# Altium PCB MEGA2560_Rev3e.PcbDoc (part 1 of 2)
Units mil, origin at the board's own origin, x right, y up, seen from the top; angles counter-clockwise.
Board outline 4000 x 2100 mil, 2 copper layers (Top, Bottom); 60 components, 84 nets, 364 pads, 139 vias.
Unrouted connection lines stored in the file: 1.
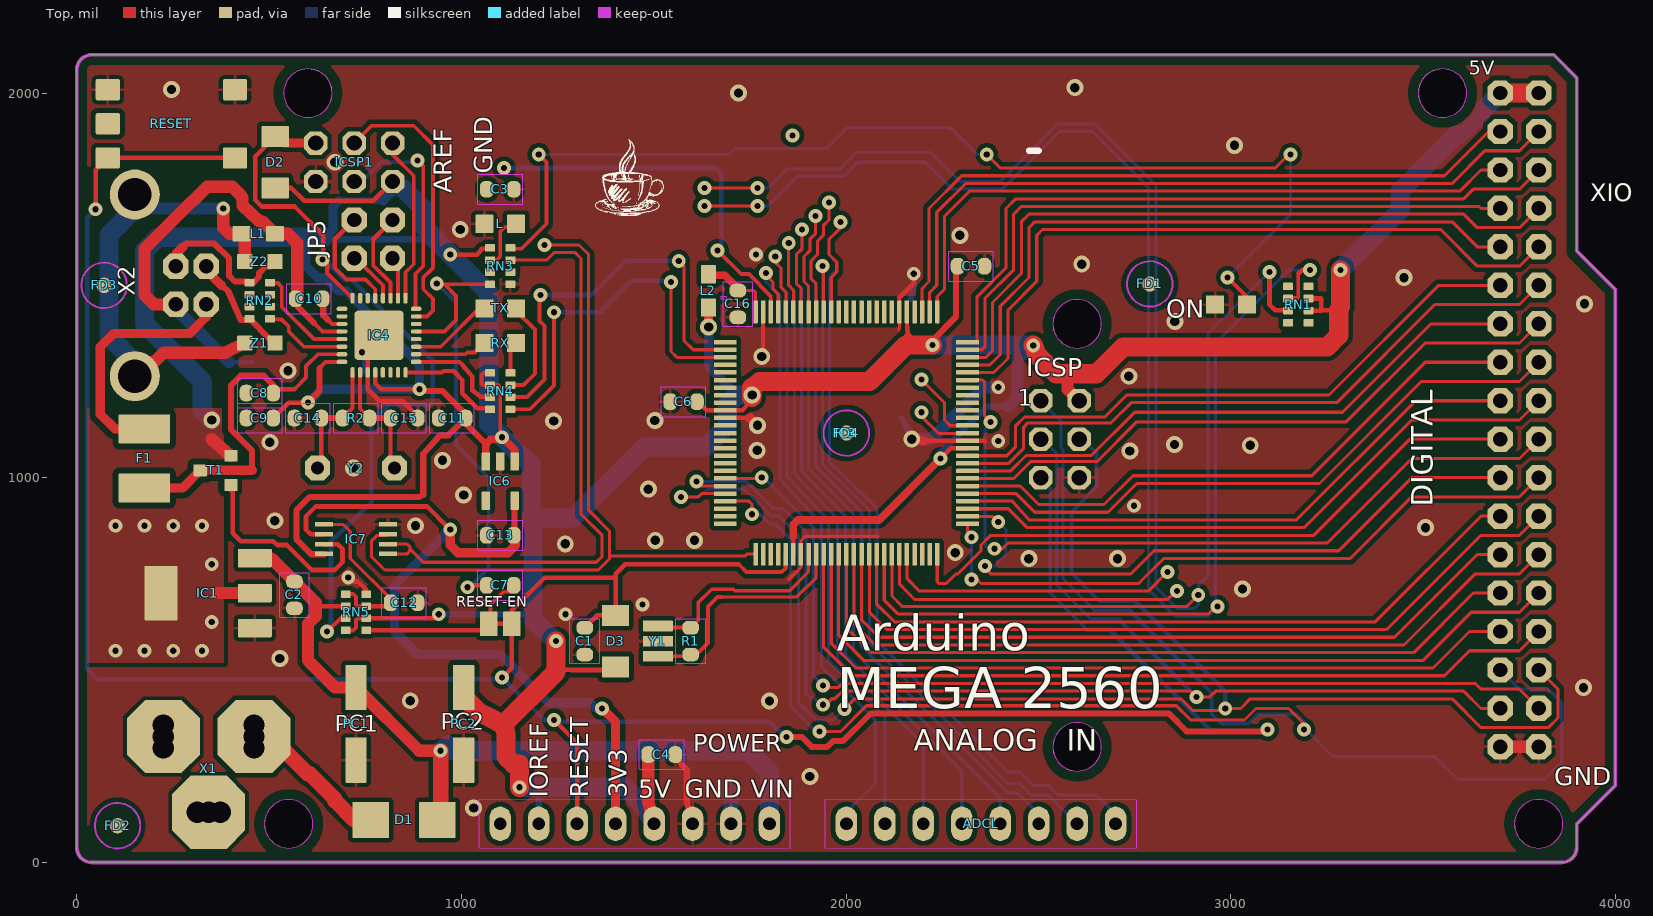
[diagram p0: Top view]
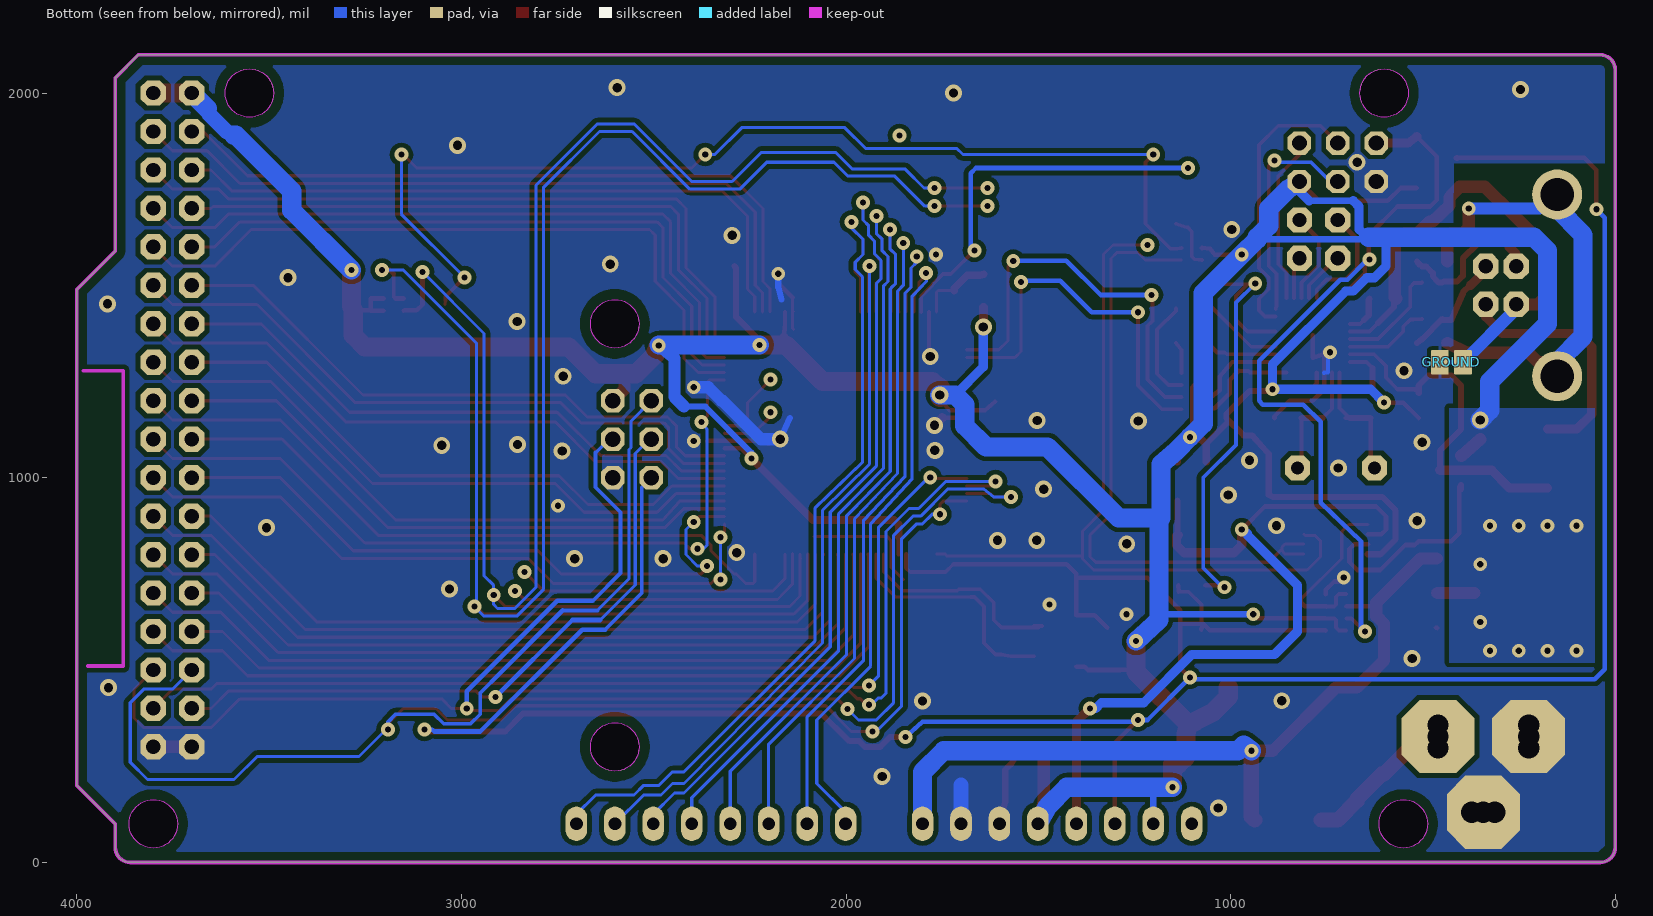
[diagram p1: Bottom view, seen from below]

## Layer stack, top to bottom
Top Solder: solder mask 0.4, Solder Resist, Dk 3.5
Top: signal copper 1.378
Dielectric 1: dielectric 12.6, FR-4, Dk 4.8
Bottom: signal copper 1.378
Bottom Solder: solder mask 0.4, Solder Resist, Dk 3.5

## Board outline
3840,2100 3900,2040 3900,1590 4000,1490 4000,200 3900,100 3900,39.37 cw(c3860.63,39.37) 3860.63,0 39.37,0 cw(c39.37,39.37) 0,39.37 0,2060.63 cw(c39.37,2060.63) 39.37,2100
cut-out: 551.01,37.51 ccw(c551.01,100.5) 614,100.5 ccw(c551.01,100.5) 551.01,163.49 ccw(c551.01,100.5) 488.02,100.5 ccw(c551.01,100.5)
cut-out: 2601.01,1337.51 ccw(c2601.01,1400.5) 2664,1400.5 ccw(c2601.01,1400.5) 2601.01,1463.49 ccw(c2601.01,1400.5) 2538.02,1400.5 ccw(c2601.01,1400.5)
cut-out: 2601.01,237.51 ccw(c2601.01,300.5) 2664,300.5 ccw(c2601.01,300.5) 2601.01,363.49 ccw(c2601.01,300.5) 2538.02,300.5 ccw(c2601.01,300.5)
cut-out: 3801.01,37.51 ccw(c3801.01,100.5) 3864,100.5 ccw(c3801.01,100.5) 3801.01,163.49 ccw(c3801.01,100.5) 3738.02,100.5 ccw(c3801.01,100.5)
cut-out: 601.01,1937.51 ccw(c601.01,2000.5) 664,2000.5 ccw(c601.01,2000.5) 601.01,2063.49 ccw(c601.01,2000.5) 538.02,2000.5 ccw(c601.01,2000.5)
cut-out: 3551.01,1937.51 ccw(c3551.01,2000.5) 3614,2000.5 ccw(c3551.01,2000.5) 3551.01,2063.49 ccw(c3551.01,2000.5) 3488.02,2000.5 ccw(c3551.01,2000.5)

## Design rules (kind name [scope] priority, off if disabled: settings)
BoardOutlineClearance mdCopperDimension [All] p1: gap=10 ignorepadtopadclearanceinfootprint=FALSE except(0: Arc-SplitContinuation Track-SplitContinuation SMDPad-SplitContinuation THPad-SplitContinuation Via-SplitContinuation Fill-SplitContinuation Poly-SplitContinuation Region-SplitContinuation Text-SplitContinuation; 27: Poly-OutlineEdge Poly-CavityEdge Poly-CutoutEdge Poly-SplitBarrior)
Clearance Clearance_for_PolygonClass_Isolate_16 [InPolygonClass('Isolate_16') vs IsArc Or IsTrack Or IsPad Or IsVia Or IsFill Or IsRegion Or IsText] p1: gap=16 ignorepadtopadclearanceinfootprint=FALSE
Clearance Clearance_for_PolygonClass_Isolate_12 [InPolygonClass('Isolate_12') vs IsArc Or IsTrack Or IsPad Or IsVia Or IsFill Or IsRegion Or IsText] p2: gap=12 ignorepadtopadclearanceinfootprint=FALSE
Clearance "Clearance (Same Net)" [All] p3: gap=7 ignorepadtopadclearanceinfootprint=FALSE
Clearance "Clearance_for_NetClass_power usb" [InNetClass('power usb') vs InNetClass('power usb')] p4: gap=8 ignorepadtopadclearanceinfootprint=FALSE
Clearance Clearance_for_NetClass_gnd [InNetClass('gnd') vs InNetClass('gnd')] p5: gap=8 ignorepadtopadclearanceinfootprint=FALSE
Clearance Clearance_for_NetClass_power [InNetClass('power') vs InNetClass('power')] p6: gap=8 ignorepadtopadclearanceinfootprint=FALSE
Clearance [All] p7: gap=7 ignorepadtopadclearanceinfootprint=FALSE except(8: Track-Via THPad-THPad; 10: Via-Via; 12: THPad-Via)
HoleSize "HoleSize_For_NetClass_power usb" [InNetClass('power usb')] p1: absolutevalues=TRUE maxlimit=16 minlimit=16 maxpercent=80.000 minpercent=20.000
HoleSize HoleSize_For_NetClass_gnd [InNetClass('gnd')] p2: absolutevalues=TRUE maxlimit=16 minlimit=16 maxpercent=80.000 minpercent=20.000
HoleSize HoleSize_For_NetClass_power [InNetClass('power')] p3: absolutevalues=TRUE maxlimit=16 minlimit=16 maxpercent=80.000 minpercent=20.000
HoleSize [All] p4: absolutevalues=TRUE maxlimit=100000 minlimit=16 maxpercent=80.000 minpercent=20.000
HoleToHoleClearance mdDrill [All] p1: gap=12 allowstackedmicrovias=TRUE
MinimumSolderMaskSliver [All] p1 off: minsoldermaskwidth=10
PasteMaskExpansion Expansion_SMDPaste_OFF [InPadClass('SMDPaste_OFF')] p1: expansion=0
PasteMaskExpansion mlMinCreamFrame [All] p2: expansion=-2
PolygonConnect PolygonConnect_For_PolygonThermal_ON_Width80000_Gap100000 [InPolygonClass('PolygonThermal_ON_Width80000_Gap100000') vs Not IsVia] p1: connectstyle=Relief reliefconductorwidth=8 reliefentries=4 polygonreliefangle="90 Angle" airgapwidth=10
PolygonConnect PolygonConnect_For_PolygonThermal_ON_Width120000_Gap100000 [InPolygonClass('PolygonThermal_ON_Width120000_Gap100000') vs Not IsVia] p2: connectstyle=Relief reliefconductorwidth=12 reliefentries=4 polygonreliefangle="90 Angle" airgapwidth=10
PolygonConnect PolygonConnect_For_PolygonThermal_OFF [InPolygonClass('PolygonThermal_OFF')] p3: connectstyle=Direct reliefconductorwidth=10 reliefentries=4 polygonreliefangle="90 Angle" airgapwidth=10
PolygonConnect ThermalVias [IsVia] p4: connectstyle=Direct reliefconductorwidth=10 reliefentries=4 polygonreliefangle="90 Angle" airgapwidth=10
PolygonConnect [All] p5: connectstyle=Relief reliefconductorwidth=10 reliefentries=4 polygonreliefangle="90 Angle" airgapwidth=10
RoutingVias [All] p1: holewidth=16 width=36 viastyle="Through Hole" minholewidth=16 minwidth=36 maxholewidth=100 maxwidth=100
SolderMaskExpansion Expansion_SMDSolder_OFF [InPadClass('SMDSolder_OFF')] p1: expansion=0 istentingtop=FALSE
SolderMaskExpansion mlMinStopFrame [All] p2: expansion=2 istentingtop=FALSE
Width "Width_For_NetClass_power usb" [InNetClass('power usb')] p1: maxlimit=40 minlimit=10 preferedwidth=20
Width Width_For_NetClass_gnd [InNetClass('gnd')] p2: maxlimit=24 minlimit=10 preferedwidth=12
Width Width_For_NetClass_power [InNetClass('power')] p3: maxlimit=48 minlimit=10 preferedwidth=24
Width [All] p4: maxlimit=50 minlimit=5 preferedwidth=8 minimp=50.000000 maximp=50.000000 favimp=50.000000
26 further rules are at their usual default settings.

## Classes and differential pairs
component class MEGA2560_Rev3e_1: C7 C8 C9 C10 C14 C15 D2 F1 GROUND IC4 ICSP1 JP5 L1 R2 RESET-EN RN2 RN4 RX TX X2 Y2 Z1 Z2
component class MEGA2560_Rev3e_0: ADCL C1 C2 C3 C4 C5 C6 C11 C12 C13 C16 D1 D3 FD1 FD2 FD3 FD4 IC1 IC6 IC7 ICSP L L2 ON PC1 PC2 POWER R1 RESET RN1 RN3 RN5 T1 X1 XIO Y1
polygon class PolygonThermal_ON_Width80000_Gap100000: Polygon_1_Net_GND Polygon_2_Net_GND
polygon class PolygonThermal_ON_Width120000_Gap100000: Polygon_2_Net_+5V
polygon class PolygonThermal_OFF: Polygon_1_Net_+5V
polygon class Isolate_16: Polygon_1_Net_+5V
polygon class Isolate_12: Polygon_1_Net_GND Polygon_2_Net_GND
pad class SMDSolder_OFF: IC4-33
pad class SMDPaste_OFF: IC4-33 RESET-5

## Components (designator, comment, footprint, x,y, rotation, side; value= is the part's Value field where it differs from the comment)
ADCL "FH254-108DF08500V" 1X08 2351.01,100.5 r0 top
C1 "22p" C0603-ROUND 1321.01,575.5 r270 top
C2 "100nF" C0603-ROUND 566.01,695.5 r270 top
C3 "100nF" C0603-ROUND 1101.01,1750.5 r0 top
C4 "100nF" C0603-ROUND 1521.01,280.5 r0 top
C5 "100nF" C0603-ROUND 2325.01,1550.5 r0 top
C6 "100nF" C0603-ROUND 1577.58,1198.1 r180 top
C7 "100nF" C0603-ROUND 1101.01,720.5 r0 top
C8 "100nF" C0603-ROUND 476.01,1220.5 r180 top
C9 "100nF" C0603-ROUND 476.01,1155.5 r180 top
C10 "1uF" C0603-ROUND 604.01,1465.5 r180 top
C11 "100nF" C0603-ROUND 976.01,1155.5 r0 top
C12 "100nF" C0603-ROUND 851.01,675.5 r180 top
C13 "1uF" C0603-ROUND 1101.01,850.5 r0 top
C14 "22p" C0603-ROUND 601.01,1155.5 r180 top
C15 "22p" C0603-ROUND 851.01,1155.5 r0 top
C16 "100nF" C0603-ROUND 1718.93,1452.08 r270 top
D1 "M7" SMB 851.01,110.5 r180 top
D2 "CD1206-S01575" MINIMELF 516.01,1820.5 r90 top
D3 "CD1206-S01575" MINIMELF 1401.01,575.5 r90 top
F1 "MF-MSMF050-2 500mA" L1812 176.01,1050.5 r90 top
FD1 "FIDUCIALMOUNT" FIDUCIA-MOUNT 2790.01,1504.13 r0 top
FD2 "FIDUCIALMOUNT" FIDUCIA-MOUNT 106.01,95.5 r0 top
FD3 "FIDUCIALMOUNT" FIDUCIA-MOUNT 71.01,1500.5 r0 top
FD4 "FIDUCIALMOUNT" FIDUCIA-MOUNT 2001.01,1116.5 r0 top
GROUND "SJ" SJ 426.01,1300.5 r0 bottom
IC1 "1870_LD1117S50CTR" LINEAR_SOT223 341.01,700.5 r90 top
IC3 "ATMEGA2560-15AU" TQFP100 2001.01,1116.5 r0 top
IC4 "ATMEGA16U2-MU" MLF32 786.01,1370.5 r90 top
IC6 "LP2985-33DBVR" SOT23-DBV 1101.01,991.5 r180 top
IC7 "LMV358IDGKR" MSOP08 726.01,840.5 r90 top
ICSP "ICSP" 2X03 2556.01,1100.5 r270 top
ICSP1 "ICSP" 2X03 721.01,1820.5 r180 top
JP5 "2x2M - NM" 2X02 771.01,1620.5 r90 top
L "Yellow" CHIPLED_0805 1101.01,1660.5 r90 top
L1 "MH2029-300Y" 0805 472.01,1634.5 r180 top
L2 "10uH" 0805 1642.21,1485.92 r270 top
ON "Green" CHIPLED_0805 3001.01,1450.5 r90 top
PC1 "47uF" PANASONIC_D 726.01,360.5 r90 top
PC2 "47uF" PANASONIC_D 1006.01,360.5 r90 top
POWER "FH254-108DF08500V" 1X08 1451.01,100.5 r0 top
R1 "1M" R0603-ROUND 1596.01,575.5 r90 top
R2 "1M" R0603-ROUND 726.01,1155.5 r0 top
RESET "TS42" TS42 246.01,1920.54 r0 top
RESET-EN "SJ" SJ 1101.01,620.5 r0 top
RN1 "10k" CAY16 3176.01,1450.5 r270 top
RN2 "22R" CAY16 476.01,1460.5 r90 top
RN3 "1K" CAY16 1101.01,1550.5 r270 top
RN4 "1K" CAY16 1101.01,1225.5 r90 top
RN5 "10k" CAY16 726.01,650.5 r90 top
RX "Yellow" CHIPLED_0805 1101.01,1350.5 r90 top
T1 "PMV48XP" SOT-23 361.01,1020.5 r270 top
TX "Yellow" CHIPLED_0805 1101.01,1440.5 r90 top
X1 "POWERSUPPLY_DC21MMX" POWERSUPPLY_DC-21MM 211.01,330.5 r90 top
X2 "0056_USB-B-S-RA-WT-SPCC" PN61729 151.01,1500.5 r270 top
XIO "18x2F-H8.5" 2X18 3751.01,1150.5 r270 top
Y1 "CSTCE16M0V53-R0" RESONATOR 1511.01,575.5 r270 top
Y2 "16MHz" QS 726.01,1025.5 r180 top
Z1 "BRNCG0603MLC-05E" CT/CN0603 476.01,1350.5 r0 top
Z2 "BRNCG0603MLC-05E" CT/CN0603 476.01,1562.5 r0 top

## Footprints (in the part's own frame and the unit in brackets; to place one, negate y for a bottom-side part, rotate by r counter-clockwise, add the part's x,y. Pads: shape width x height; smd on the part's side, far side on the other; paste and mask are expansions set on the pad)
1X08 [mil] "1X08"
  oval 56x89.6 hole 33.46: 1(-350,0) 2(-250,0) 3(-150,0) 4(-50,0) 5(50,0) 6(150,0) 7(250,0) 8(350,0)
  Top keep-out lines w1.97: -404.33,-61.81 404.33,-62.99 404.33,62.99 -404.33,64.17 -404.33,-61.81
2X02 [mil] "2X02"
  oct 66x66 / inner round 60.98 / far side oct 66x66 hole 37.4: 1(-50,-50) 2(-50,50) 3(50,-50) 4(50,50)
2X03 [mil] "2X03"
  oct 61.02x61.02 / inner round 56.38 / far side oct 61.02x61.02 hole 40: 1(-100,-50) 2(-100,50) 3(0,-50) 4(0,50) 5(100,-50) 6(100,50)
2X18 [mil] "2X18"
  oct 66x66 / inner round 60.98 / far side oct 66x66 hole 37.4: 1(-850,-50) 2(-850,50) 3(-750,-50) 4(-750,50) 5(-650,-50) 6(-650,50) 7(-550,-50) 8(-550,50) 9(-450,-50) 10(-450,50) 11(-350,-50) 12(-350,50) 13(-250,-50) 14(-250,50) 15(-150,-50) 16(-150,50) 17(-50,-50) 18(-50,50) 19(50,-50) 20(50,50) 21(150,-50) 22(150,50) 23(250,-50) 24(250,50) 25(350,-50) 26(350,50) 27(450,-50) 28(450,50) 29(550,-50) 30(550,50) 31(650,-50) 32(650,50) 33(750,-50) 34(750,50) 35(850,-50) 36(850,50)
0805 [mm] "0805"
  rrect10% 1.2x1 smd: 1(-1.1,0) 2(1.1,0)
C0603-ROUND [mil] "C0603-ROUND"
  rrect80% 35.37x43.31 smd: 1(-35,0) 2(35,0)
  Top keep-out lines w2: 57.99,-38.7 -57.99,-38.7 -57.99,38.7 57.99,38.7 57.99,-38.7
CAY16 [mm] "CAY16"
  rrect20% 0.5x0.65 smd: 1(-1.2,-0.675) 2(-0.4,-0.675) 3(0.4,-0.675) 4(1.2,-0.675) 5(1.2,0.675) 6(0.4,0.675) 7(-0.4,0.675) 8(-1.2,0.675)
CHIPLED_0805 [mil] "CHIPLED_0805"
  rrect8% 47.24x47.24 smd: A(0,-41.34) C(0,41.34)
CT/CN0603 [mm] "CT/CN0603"
  rrect10% 1x1 smd: 1(-1,0) 2(1,0)
FIDUCIA-MOUNT [mil] "FIDUCIA-MOUNT"
  rrect100% 40x40 smd: P$1(0,0)
  Top keep-out circle w5: c0,0 r59.06
L1812 [mil] "L1812"
  rrect5% 74.8x133.86 smd: 1(-76.77,0) 2(76.77,0)
LINEAR_SOT223 [mil] "LINEAR_SOT223"
  rrect8% 48x88 smd: 1(-91,-122) 2(0,-122) 3(91,-122)
  rrect4% 141.73x86.61 smd: 4(0,122.01)
MINIMELF [mil] "MINIMELF"
  rrect7% 55.12x70.87 smd: A(66.93,0) C(-66.93,0)
MLF32 [mil] "MLF32"
  rrect80% 27.56x11.02 smd: 1(-96.46,68.9) 2(-96.46,49.21) 3(-96.46,29.53) 4(-96.46,9.84) 5(-96.46,-9.84) 6(-96.46,-29.53) 7(-96.46,-49.21) 8(-96.46,-68.9) 17(96.46,-68.9) 18(96.46,-49.21) 19(96.46,-29.53) 20(96.46,-9.84) 21(96.46,9.84) 22(96.46,29.53) 23(96.46,49.21) 24(96.46,68.9)
  rrect80% 11.02x27.56 smd: 9(-68.9,-96.46) 10(-49.21,-96.46) 11(-29.53,-96.46) 12(-9.84,-96.46) 13(9.84,-96.46) 14(29.53,-96.46) 15(49.21,-96.46) 16(68.9,-96.46) 25(68.9,96.46) 26(49.21,96.46) 27(29.53,96.46) 28(9.84,96.46) 29(-9.84,96.46) 30(-29.53,96.46) 31(-49.21,96.46) 32(-68.9,96.46)
  rrect15% 128.11x128.11 smd paste+0 mask+0: 33(0,0)
MSOP08 [mil] "MSOP08"
  rrect20% 11.81x47.24 smd: 1(-38.43,-83.19) 2(-12.83,-83.19) 3(12.76,-83.19) 4(38.35,-83.19) 5(38.35,83.15) 6(12.76,83.15) 7(-12.83,83.15) 8(-38.43,83.15)
PANASONIC_D [mm] "PANASONIC_D"
  rrect7% 3x1.4 smd: +(2.4,0) -(-2.4,0)
PN61729 [mil] "PN61729"
  oct 66x66 / inner round 60.98 / far side oct 66x66 hole 37.4: 1(49.21,185.43) 2(-49.21,185.43) 3(-49.21,106.69) 4(49.21,106.69)
  round 129.91 hole 86.61: P$1(-236.22,0) P$2(236.22,0)
POWERSUPPLY_DC-21MM [mil] "POWERSUPPLY_DC-21MM"
  oct 190x190 / inner round 175.54 / far side oct 190x190 hole 55.12: 1(-200,-132) 2(-3,-250) 3(-3,-14)
  round 82.68 hole 55.12: 4(-200,-162) 5(-200,-102) 6(-33,-14) 7(27,-14) 8(-33,-250) 9(27,-250)
QS [mil] "QS"
  oct 66x66 / inner round 60.98 / far side oct 66x66 hole 33.46: 1(-100,0) 2(100,0)
R0603-ROUND [mil] "R0603-ROUND"
  rrect80% 35.37x43.31 smd: 1(-35,0) 2(35,0)
  Top keep-out lines w2: -57.99,38.7 -57.99,-38.7 57.99,-38.7 57.99,38.7 -57.99,38.7
RESONATOR [mm] "RESONATOR"
  rrect14% 0.7x2 smd: 1(-1,0) 2(0,0) 3(1,0)
SJ [mil] "SJ"
  rrect8% 46x63 smd: 1(-30,0) 2(30,0)
SMB [mil] "SMB"
  rrect4% 94.49x94.49 smd: A(86.61,0) C(-86.61,0)
SOT23-DBV [mil] "SOT23-DBV"
  rrect18% 21.65x47.24 smd: 1(-37.4,-51.18) 2(0,-51.18) 3(37.4,-51.18) 4(37.4,51.18) 5(-37.4,51.18)
SOT-23 [mil] "SOT-23"
  rrect12% 31x35 smd: 1(1,-40) 2(-37,40) 3(39,40)
TQFP100 [mm] "TQFP100"
  rrect20% 1.5x0.3 smd: 1(-8,6) 2(-8,5.5) 3(-8,5) 4(-8,4.5) 5(-8,4) 6(-8,3.5) 7(-8,3) 8(-8,2.5) 9(-8,2) 10(-8,1.5) 11(-8,1) 12(-8,0.5) 13(-8,0) 14(-8,-0.5) 15(-8,-1) 16(-8,-1.5) 17(-8,-2) 18(-8,-2.5) 19(-8,-3) 20(-8,-3.5) 21(-8,-4) 22(-8,-4.5) 23(-8,-5) 24(-8,-5.5) 25(-8,-6) 51(8,-6) 52(8,-5.5) 53(8,-5) 54(8,-4.5) 55(8,-4) 56(8,-3.5) 57(8,-3) 58(8,-2.5) 59(8,-2) 60(8,-1.5) 61(8,-1) 62(8,-0.5) 63(8,0) 64(8,0.5) 65(8,1) 66(8,1.5) 67(8,2) 68(8,2.5) 69(8,3) 70(8,3.5) 71(8,4) 72(8,4.5) 73(8,5) 74(8,5.5) 75(8,6)
  rrect20% 0.3x1.5 smd: 26(-6,-8) 27(-5.5,-8) 28(-5,-8) 29(-4.5,-8) 30(-4,-8) 31(-3.5,-8) 32(-3,-8) 33(-2.5,-8) 34(-2,-8) 35(-1.5,-8) 36(-1,-8) 37(-0.5,-8) 38(0,-8) 39(0.5,-8) 40(1,-8) 41(1.5,-8) 42(2,-8) 43(2.5,-8) 44(3,-8) 45(3.5,-8) 46(4,-8) 47(4.5,-8) 48(5,-8) 49(5.5,-8) 50(6,-8) 76(6,8) 77(5.5,8) 78(5,8) 79(4.5,8) 80(4,8) 81(3.5,8) 82(3,8) 83(2.5,8) 84(2,8) 85(1.5,8) 86(1,8) 87(0.5,8) 88(0,8) 89(-0.5,8) 90(-1,8) 91(-1.5,8) 92(-2,8) 93(-2.5,8) 94(-3,8) 95(-3.5,8) 96(-4,8) 97(-4.5,8) 98(-5,8) 99(-5.5,8) 100(-6,8)
TS42 [mil] "TS42"
  rrect15% 62.99x55.12 smd: 1(-165.35,88.58) 2(165.35,88.58) 3(-165.35,-88.58) 4(165.35,-88.58)
  rrect15% 62.99x55.12 smd paste+0: 5(-165.35,0)

## Part data
ADCL: library part 0058_FH254-108DF08500V, "Female Connector strip for Arduino bases - 8x1 F V h 8,5 p2,54mm", CASE=CASE, DeviceSetName=0058_FH254-108DF08500V, GateName_1=A, LibraryName=Connettori, MONTHLY_USAGE=_____, PART_NUMBER=FH254-108DF08500V, PRICE=_____, SUPPLIER=_____, SymbolName_1=PINHD8, TYPE=Connettori
C1 C14 C15: library part 0014_22PF_0603, "22pF 0603", CASE=0603, DeviceSetName=0014_22PF_0603, GateName_1=G$1, LibraryName=Condensatori, MONTHLY_USAGE=_____, PART_NUMBER=22pF_0603, PRICE=_____, SUPPLIER=_____, SymbolName_1=C-EU, TYPE=Condensatori
C2 C3 C4 C5 C6 C7 C8 C9 C11 C12 C16: library part 0015_100NF_0603, "100nF 0603 50V", CASE=0603, DeviceSetName=0015_100NF_0603, GateName_1=G$1, LibraryName=Condensatori, MONTHLY_USAGE=_____, PART_NUMBER=cl10b104kbnc, PRICE=_____, SUPPLIER=_____, SymbolName_1=C-EU, TYPE=Condensatori
C10 C13: library part 0006_1UF_0603/GRM188R61E105KA12D, "1uF 0603", CASE=0603, DeviceSetName=0006_1UF_0603/GRM188R61E105KA12D, GateName_1=G$1, LibraryName=Condensatori, MONTHLY_USAGE=_____, PART_NUMBER=1uF_0603/GRM188R61E105KA12D, PRICE=_____, SUPPLIER=_____, SymbolName_1=C-EU, TYPE=Condensatori
D1: library part 0020_M7, "1.0A 40V SURFACE MOUNT GLASS PASSIVATED RECTIFIER   M7", CASE=SMA, DeviceSetName=0020_M7, GateName_1=G$1, LibraryName=Diodi, MONTHLY_USAGE=_____, PART_NUMBER=M7, PRICE=_____, SUPPLIER=_____, SymbolName_1=D, TYPE=Diodi
D2 D3: library part 0012_CD1206-S01575, "small-signal high-speed Switching Diodes   CD1206", CASE=1206, DeviceSetName=0012_CD1206-S01575, GateName_1=G$1, LibraryName=Diodi, MONTHLY_USAGE=_____, PART_NUMBER=CD1206-S01575, PRICE=_____, SUPPLIER=_____, SymbolName_1=D, TYPE=Diodi
F1: library part 0002_MF-MSMF050-2, "500 mA Multifuse ï¿½ Polyfuse", CASE=CASE, DeviceSetName=0002_MF-MSMF050-2, GateName_1=G$1, LibraryName=Protezione, MONTHLY_USAGE=_____, PART_NUMBER=MF-MSMF050-2, PRICE=_____, SUPPLIER=_____, SymbolName_1=L-EU, TYPE=Protezione
GROUND RESET-EN: "SMD solder JUMPER", DeviceSetName=SJ, GateName_1=1, LibraryName=jumper, SymbolName_1=SJ
IC1: "Low-dropout linear regulator 5V  -LM1117IMPX-5.0", CASE=SOT223, DeviceSetName=1870_LD1117S50CTR, GateName_1=G$1, LibraryName=IntegratedCircuits, MONTHLY_USAGE=_____, PART_NUMBER=LD1117S50CTR, PRICE=_____, SUPPLIER=_____, SymbolName_1=LINEAR_VREG-O2, TYPE=Circuito_Integrato
IC3: library part 0023_ATMEGA2560-16AU, "8-bit Microcontroller with 256K Bytes In-System Programmable Flash - ATMEGA2560-16AU", CASE=TQFP100_14x14, DeviceSetName=0023_ATMEGA2560-16AU, GateName_1=1, GND=GND, LibraryName=IntegratedCircuits, MONTHLY_USAGE=_____, PART_NUMBER=ATMEGA2560-16AU, PRICE=_____, SUPPLIER=_____, SymbolName_1=86-I/O-1, TYPE=Circuito_Integrato, VCC=VCC
IC4: library part 0007_ATMEGA16U2-MUR, "8-bit Microcontroller with 16K Bytes of ISP Flash and USB Controller   ATMEGA16U2-MUR", CASE=QFN32_5x5, DeviceSetName=0007_ATMEGA16U2-MUR, GateName_1=G$1, LibraryName=IntegratedCircuits, MONTHLY_USAGE=_____, PART_NUMBER=ATMEGA16U2-MUR, PRICE=_____, SUPPLIER=_____, SymbolName_1=ATMEL_MEGA8U2, TYPE=Circuito_Integrato
IC6: library part 0008_TEXLP2985-33DBVR, "150-mA LOW-NOISE LOW-DROPOUT REGULATOR WITH SHUTDOWN   LP2985-33DBVR", CASE=SOT23-5, DeviceSetName=0008_TEXLP2985-33DBVR, GateName_1=G$1, LibraryName=IntegratedCircuits, MONTHLY_USAGE=_____, PART_NUMBER=TEXLP2985-33DBVR, PRICE=_____, SUPPLIER=_____, SymbolName_1=LP2985-XXDBVR, TYPE=Circuito_Integrato
IC7: library part 0021_LMV358IDGKR, "Dual low-voltage (2.7 V to 5.5 V), operational amplifiers with rail-to-rail output swing   LMV358IDGKR", CASE=MSOP8, DeviceSetName=0021_LMV358IDGKR, GateName_1=A, GateName_2=B, GateName_3=P, LibraryName=IntegratedCircuits, MONTHLY_USAGE=_____, PART_NUMBER=LMV358IDGKR, PRICE=_____, SUPPLIER=_____, SymbolName_1=OPAMP, SymbolName_2=OPAMP, SymbolName_3=PWR+-, TYPE=Circuito_Integrato, V+=V+, V-=V-
ICSP ICSP1: library part 0114_PH254-203DF118A00V, "3x2 M V h 8,5 mm p2,54", CASE=CASE, DeviceSetName=0114_PH254-203DF118A00V, GateName_1=A, LibraryName=Connettori, MONTHLY_USAGE=_____, PART_NUMBER=PH254-203DF118A00V, PRICE=_____, SUPPLIER=_____, SymbolName_1=PINH2X3, TYPE=Connettori
JP5: library part PINHD-2X2, "PIN HEADER", DeviceSetName=PINHD-2X2, GateName_1=A, LibraryName=SmartPrj, SymbolName_1=PINH2X2
L RX TX: library part 0044_KPT-2012YC, "LED YELLOW - SMD - 0805", CASE=CASE, DeviceSetName=0044_KPT-2012YC, GateName_1=G$1, LibraryName=Opto, MONTHLY_USAGE=_____, PART_NUMBER=KPT-2012YC, PRICE=_____, SUPPLIER=_____, SymbolName_1=LED, TYPE=Opto
L1: library part 0001_BLM21PG300SN1D_/_MH2029-300Y, "BLM21", CASE=CASE, DeviceSetName=0001_BLM21PG300SN1D_/_MH2029-300Y, GateName_1=G$1, LibraryName=Protezione, MONTHLY_USAGE=_____, PART_NUMBER=BLM21PG300SN1D_/_MH2029-300Y, PRICE=_____, SUPPLIER=_____, SymbolName_1=L, TYPE=Protezione
L2: library part 0715_CV201210-100K, "10uH 0805", CASE=0805, DeviceSetName=0715_CV201210-100K, GateName_1=G$1, LibraryName=Induttanze, MONTHLY_USAGE=_____, PART_NUMBER=CV201210-100K, PRICE=_____, SUPPLIER=_____, SymbolName_1=L, TYPE=Induttanze
ON: library part 0043_KPT-2012SGC, "LED GREEN - SMD-0805", CASE=CASE, DeviceSetName=0043_KPT-2012SGC, GateName_1=G$1, LibraryName=Opto, MONTHLY_USAGE=_____, PART_NUMBER=KPT-2012SGC, PRICE=_____, SUPPLIER=_____, SymbolName_1=LED, TYPE=Opto
PC1 PC2: library part 0113_47UF, CASE=CASE, +=+, DeviceSetName=0113_47UF, GateName_1=G$1, LibraryName=Condensatori, MONTHLY_USAGE=_____, PART_NUMBER=47uF, PRICE=_____, SUPPLIER=_____, SymbolName_1=CPOL, TYPE=Condensatori
POWER: library part 1217_FH254-108DF08500T21, "Female Connector strip for Arduino bases - 8x1 F V h 8,5 p2,54 serigrafato POWER", CASE=CASE, DeviceSetName=1217_FH254-108DF08500T21, GateName_1=A, LibraryName=Connettori, MONTHLY_USAGE=_____, PART_NUMBER=FH254-108DF08500T21, PRICE=_____, SUPPLIER=_____, SymbolName_1=PINHD8, TYPE=Connettori
R1 R2: library part 0004_0603_1M, "1M 0603", CASE=0603, DeviceSetName=0004_0603_1M, GateName_1=G$1, LibraryName=Resistenze, MONTHLY_USAGE=_____, PART_NUMBER=0603_1M, PRICE=_____, SUPPLIER=_____, SymbolName_1=R-EU, TYPE=Resistenze
RESET: library part 0946_TS42031-160W-TR-7260, "Pushbutton 6x6 Smd - White", CASE=CASE, DeviceSetName=0946_TS42031-160W-TR-7260, GateName_1=G$1, LibraryName=Switches, MONTHLY_USAGE=_____, PART_NUMBER=IT-1157AHNP-160G-G_GTR, PRICE=_____, SUPPLIER=_____, SymbolName_1=ST-MOD_V1.4_TS42, TYPE=Switches
RN1 RN5: library part 0016_064R_10K_/_CAY16-103J4LF, "10K 064 R", CASE=SMD_3,2x1,6, DeviceSetName=0016_064R_10K_/_CAY16-103J4LF, GateName_1=A, GateName_2=B, GateName_3=C, GateName_4=D, LibraryName=Resistenze, MONTHLY_USAGE=_____, PART_NUMBER=064R_10K_/_CAY16-103J4LF, PRICE=_____, SUPPLIER=_____, SymbolName_1=R1NV, SymbolName_2=R1NV, SymbolName_3=R1NV, SymbolName_4=R1NV, TYPE=Resistenze
RN2: library part 0003_064R_22R_/_CAY16-220J4LF, "22R 064R", CASE=SMD_3,2x1,6, DeviceSetName=0003_064R_22R_/_CAY16-220J4LF, GateName_1=A, GateName_2=B, GateName_3=C, GateName_4=D, LibraryName=Resistenze, MONTHLY_USAGE=_____, PART_NUMBER=064R_22R_/_CAY16-220J4LF, PRICE=_____, SUPPLIER=_____, SymbolName_1=R1NV, SymbolName_2=R1NV, SymbolName_3=R1NV, SymbolName_4=R1NV, TYPE=Resistenze
RN3 RN4: library part 0005_064R_1K_/_CAY16-102J4LF, "1K 064R", CASE=SMD_3,2x1,6, DeviceSetName=0005_064R_1K_/_CAY16-102J4LF, GateName_1=A, GateName_2=B, GateName_3=C, GateName_4=D, LibraryName=Resistenze, MONTHLY_USAGE=_____, PART_NUMBER=064R_1K_/_CAY16-102J4LF, PRICE=_____, SUPPLIER=_____, SymbolName_1=R1NV, SymbolName_2=R1NV, SymbolName_3=R1NV, SymbolName_4=R1NV, TYPE=Resistenze
T1: library part 0297_PMV48XP, "20 V, 3.5 A P-channel Trench MOSFET - PMV48XP", CASE=SOT23, DeviceSetName=0297_PMV48XP, GateName_1=A, LibraryName=Transistors, MONTHLY_USAGE=_____, PART_NUMBER=PMV48XP, PRICE=_____, SUPPLIER=_____, SymbolName_1=P_MOSFET, TYPE=Transistor
X2: "USB - B", CASE=CASE, DeviceSetName=0056_USB-B-S-RA-WT-SPCC, GateName_1=G$1, LibraryName=Connettori, MONTHLY_USAGE=_____, PART_NUMBER=USB-B-S-RA-WT-SPCC, PRICE=_____, SUPPLIER=_____, SymbolName_1=J11, TYPE=Connettori, USB=USB
XIO: library part 0060_FH254-218DF08500V, "18x2 F V h 8,5 p2,54", CASE=CASE, DeviceSetName=0060_FH254-218DF08500V, GateName_1=A, LibraryName=Connettori, MONTHLY_USAGE=_____, PART_NUMBER=FH254-218DF08500V, PRICE=_____, SUPPLIER=_____, SymbolName_1=PINH2X18, TYPE=Connettori
Y1: library part 0011_CSTCE16M0V53-R0, "16Mhz - SMD", CASE=CASE, DeviceSetName=0011_CSTCE16M0V53-R0, GateName_1=G$1, LibraryName=Cristalli, MONTHLY_USAGE=_____, PART_NUMBER=CSTCE16M0V53-R0, PRICE=_____, SUPPLIER=_____, SymbolName_1=RESONATOR, TYPE=Cristalli
Y2: library part 0019_P011052006_16M, "16MHz THT", CASE=CASE, DeviceSetName=0019_P011052006_16M, GateName_1=G$1, LibraryName=Cristalli, PART_NUMBER="P011052006 16M/FTX16M20S", SymbolName_1=XTAL, TYPE=Cristalli
Z1 Z2: library part 0010_BRNCG0603MLC-05E, "CG0603MLC-05E", CASE=CASE, DeviceSetName=0010_BRNCG0603MLC-05E, GateName_1=G$1, LibraryName=Protezione, MONTHLY_USAGE=_____, PART_NUMBER=BRNCG0603MLC-05E, PRICE=_____, SUPPLIER=_____, SymbolName_1=VARISTOR, TYPE=Protezione
FD1 FD2 FD3 FD4: DeviceSetName=FIDUCIALMOUNT, GateName_1=G$1, LibraryName=SmartPrj, SymbolName_1=FIDUCIAL
X1: DeviceName=X, DeviceSetName=POWERSUPPLY_DC21MM, GateName_1=G$1, LibraryName=SmartPrj, SymbolName_1=POWERSUPPLY_DC21PWR

## Free pads (board coordinates)
  round 125.98 hole 125.98 unplated: MH1(3801.01,100.5) MH2(601.01,2000.5) MH3(3551.01,2000.5) MH4(551.01,100.5) MH5(2601.01,1400.5) MH6(2601.01,300.5)

## Via types
v1: diameter 36/36 (per signal layer), hole 16, Top to Bottom, 93 vias
v2: diameter 44/44 (per signal layer), hole 24, Top to Bottom, 46 vias

## Nets (pads, with @x,y where several pads share a name; then routed paths per layer and width w, separated by ;. In a path a pad name is that pad's centre, name@x,y a point inside that pad or via, vN(x,y) a via of type N, cw(c..) or ccw(c..) an arc to the next point about the centre after c; other vN are vias at no path point)
8PB4: IC4.18 JP5.1 | length 119.4
  Top w10: JP5.1@811.01,1570.5 JP5.1@821.01,1570.5 835.22,1556.29 IC4.18@835.22,1466.96
8PB5: IC4.19 JP5.3 | length 242.7
  Top w10: 771.01,1620.5 771.01,1552.5 815.54,1507.97 IC4.19@815.54,1466.96
  Top w12: 771.01,1620.5 JP5.3@821.01,1670.5
8PB6: IC4.20 JP5.2 | length 137.5
  Top w10: JP5.2@721.01,1570.5 726.01,1570.5 795.85,1500.66 IC4.20@795.85,1466.96
8PB7: IC4.21 JP5.4 | length 297.1
  Top w10: 671.01,1550.5 671.01,1545.5 701.01,1515.5 751.01,1515.5 776.01,1490.5 776.01,1467.11 IC4.21@776.17,1466.96
  Top w12: 671.01,1550.5 671.01,1620.5 JP5.4@721.01,1670.5
+3V3: C13.2 IC6.5 IC7.6 POWER.4 | length 2108
  Top w12: IC7.6@642.86,853.26 608.25,853.26 596.01,865.5 596.01,900.5 621.01,925.5 911.01,925.5 v1(971.01,865.5)
  Top w16: C13.2@1138.41,851.56 IC6.5@1138.41,940.32
  Top w24: v1(971.01,865.5) 971.01,825.5 991.01,805.5 1121.01,805.5 1141.01,825.5 1141.01,848.96 C13.2@1136.01,850.5 C13.2@1138.41,851.56 ; v1(1366.01,400.5) 1401.01,365.5 POWER.4@1401.01,100.5
  Bottom w24: v1(971.01,865.5) 956.01,855.5 956.01,850.5 826.01,720.5 826.01,600.5 886.01,540.5 1101.01,540.5 1226.01,415.5 1336.01,415.5 1351.01,400.5 v1(1366.01,400.5)
+5V: C4.1 C5.1 C6.1 C9.1 C11.2 D2.C D3.C IC1.2 IC1.4 IC3.10 IC3.31 IC3.61 IC3.80 IC4.4 IC4.32 IC6.1 IC6.3 IC7.8 ICSP1.2 ICSP.2 L2.2 PC2.+ POWER.2 POWER.5 RN3.1 RN4.5 RN4.6 RN5.2 RN5.8 T1.2 XIO.1 XIO.2 | length 13611.5
  Top w10: 631.01,1285.5 647.11,1301.6 IC4.32@689.55,1301.6 ; RN5.8@699.44,603.26 718.77,603.26 726.01,610.5 726.01,630.5 730.26,634.75 RN5.2@752.58,634.75 ; RN4.5@1074.44,1272.74 1056.72,1272.74 1052.19,1268.22 1052.19,1244.59 1055.54,1241.25 RN4.6@1074.44,1241.25 1095.26,1241.25 1101.01,1235.5 1101.01,1128 1103.51,1110.5 v1(1106.01,1105.5) ; IC3.80@2158.49,1431.46 2158.97,1429.46 2158.01,1428.5 2159.01,1427.5 2159.01,1394.5 ; 2271.01,1075.5 2272.64,1077.13
  Top w11: IC4.4@776.17,1274.04 776.17,1245.34 791.01,1230.5 ; 1638.59,1175.56 IC3.10@1686.05,1175.56 1731.07,1175.56 v2@1751.01,1200.5 ; IC3.31@1863.21,801.54 1863.21,847.5 ; v1(2246.01,1050.5) 2271.01,1075.5 ; 2272.64,1077.13 IC3.61@2315.97,1077.13
  Top w12: C9.1@511.01,1155.5 551.01,1195.5 v1(601.01,1195.5) ; D2.C@516.01,1753.57 557.94,1753.57 591.01,1720.5 771.01,1720.5 ICSP1.2@821.01,1770.5 ; RN5.2@752.58,634.75 930.26,634.75 v1(941.01,645.5) ; 791.01,1230.5 v1(891.01,1230.5) ; v1(971.01,1580.5) 1041.01,1580.5 1053.69,1595.5 RN3.1@1074.44,1597.74 ; 1246.01,520.5 1257.94,508.57 1247.94,500.57 1286.01,500.5 1371.01,500.5 1379.08,508.57 D3.C@1401.01,508.57 ; C6.1@1612.58,1198.1 1638.59,1175.56 ; 2159.01,1394.5 2159.01,1384.5 2161.01,1382.5 2161.01,1365.5 ; 3202.58,1434.75 3235.26,1434.75 3236.01,1435.5 ; 3202.58,1466.25 3235.26,1466.25 3236.01,1465.5 3236.01,1435.5 ; 3281.01,1435.5 3236.01,1435.5
  Top w16: v1(601.01,1195.5) 631.01,1225.5 631.01,1285.5 ; IC7.8@642.86,802.07 643.44,801.5 610.01,801.5 571.01,840.5 571.01,915.5 606.01,950.5 891.01,950.5 901.01,955.5 901.01,1062.04 944.47,1110.5 966.01,1110.5 C11.2@1011.01,1155.5 ; v1(891.01,1230.5) 896.01,1225.5 951.01,1225.5 1011.01,1165.5 C11.2@1011.01,1155.5 ; 1063.61,1088.1 1006.01,1145.7 C11.2@1011.01,1155.5 ; v2@1754.79,1209.28 1751.01,1200.5 v2(1756.01,1215.5) ; v1(2225.01,1345.5) 2225.01,1354.5 2226.01,1357.5 2286.01,1418.5 2286.01,1546.5 C5.1@2290.01,1550.5
  Top w20: IC6.3@1062.43,1050.5 IC6.3@1063.61,1042.68 1063.61,1088.1 1076.01,1100.5 v1@1101.01,1100.5 ; v1(1106.01,1105.5) 1138.41,1073.1 IC6.1@1138.41,1042.68 ; 1863.21,847.5 1863.01,847.7 1863.01,878.5 1875.01,890.5 2086.01,890.5 v1(2246.01,1050.5)
  Top w24: v1@1101.01,1100.5 v1(1106.01,1105.5) ; L2.2@1642.21,1442.61 1642.21,1391.3 v2(1643.01,1392.5) ; 2161.01,1365.5 2161.01,1350.5 2166.01,1345.5
  Top w32: 351.01,1100.5 399.01,1057.5 T1.2@401.01,1057.5 ; 366.01,700.5 IC1.2@463.01,700.5 ; C4.1@1486.01,280.5 1486.01,155.5 POWER.5@1501.01,100.5 ; 2576.01,1270.5 2576.01,1230.5 ICSP.2@2606.01,1200.5 ; 3281.01,1370.5 3281.01,1375.5
  Top w50: PC2.+@1006.01,454.99 1006.01,430.5 1046.01,390.5 1066.01,380.5 1108.51,358 ; v1(1151.01,195.5) 1151.01,255.5 1136.01,255.5 1116.01,275.5 1116.01,335.5 1108.51,358 ; v1(1246.01,575.5) 1246.01,520.5 1246.01,495.5 1108.51,358 ; v2@1754.79,1209.28 1754.79,1234.28 1776.01,1250.5 2061.01,1250.5 2156.01,1345.5 2166.01,1345.5 v1(2225.01,1345.5) ; v1(2487.01,1344.5) 2496.01,1320.5 2546.01,1270.5 2576.01,1270.5 2651.01,1270.5 2721.01,1340.5 3251.01,1340.5 3281.01,1370.5 ; 3281.01,1375.5 3281.01,1435.5 3286.01,1445.5 v1(3286.01,1540.5) ; XIO.1@3701.01,2000.5 XIO.2@3801.01,2000.5
  Bottom w16: 641.01,1625.5 656.01,1625.5 661.01,1620.5 926.01,1620.5 ; 681.01,1720.5 796.01,1720.5 ; v1(941.01,645.5) 1186.01,645.5 ; POWER.2@1201.01,100.5 1201.01,187.5 1209.01,195.5 ; v2@1756.01,1210.5 v2(1756.01,1215.5) ; v1(2246.01,1050.5) 2246.01,1065.5 2366.01,1185.5 2421.01,1185.5
  Bottom w24: 596.01,1625.5 596.01,1550.5 626.01,1520.5 646.01,1520.5 681.01,1485.5 701.01,1485.5 891.01,1295.5 v1(891.01,1230.5) 636.01,1230.5 v1(601.01,1195.5) ; 641.01,1625.5 666.01,1645.5 666.01,1705.5 681.01,1720.5 ; 796.01,1720.5 821.01,1745.5 ICSP1.2@821.01,1770.5 ; 926.01,1620.5 931.01,1625.5 ; v2(1643.01,1392.5) 1643.01,1288.5 1716.01,1215.5 ; v1@2486.01,1345.5 v1(2487.01,1344.5)
  Bottom w32: 2421.01,1185.5 2446.01,1210.5 2446.01,1310.5 v1(2487.01,1344.5)
  Bottom w40: 3591.01,1890.5 3611.01,1900.5 3656.01,1945.5 3661.01,1960.5
  Bottom w50: v2(351.01,1150.5) 326.01,1175.5 326.01,1250.5 176.01,1400.5 176.01,1590.5 211.01,1625.5 596.01,1625.5 641.01,1625.5 ; ICSP1.2@821.01,1770.5 826.01,1765.5 851.01,1750.5 901.01,1700.5 901.01,1655.5 931.01,1625.5 931.01,1620.5 v1(971.01,1580.5) 1071.01,1480.5 1071.01,1140.5 v1(1106.01,1105.5) 1141.01,1070.5 1181.01,1035.5 1181.01,895.5 1186.01,895.5 ; v1(1151.01,195.5) 1209.01,195.5 1426.01,195.5 1476.01,145.5 POWER.5@1501.01,100.5 ; v1(1246.01,575.5) 1186.01,630.5 1186.01,645.5 1186.01,895.5 ; v2(1756.01,1215.5) 1716.01,1215.5 1691.01,1190.5 1691.01,1135.5 1636.01,1080.5 1476.01,1080.5 1291.01,895.5 1186.01,895.5 ; v1(2225.01,1345.5) v1@2486.01,1345.5 ; v1(3286.01,1540.5) 3441.01,1695.5 3441.01,1745.5 3586.01,1890.5 3591.01,1890.5 ; 3661.01,1960.5 XIO.1@3701.01,2000.5
  other v1: 101.01,550.5 176.01,550.5 251.01,550.5 326.01,550.5 351.01,625.5 351.01,775.5 101.01,875.5 176.01,875.5 251.01,875.5 326.01,875.5
ADC0: ADCL.1 IC3.97 | length 1693.2
  Top w8: v1(1791.69,1532.64) 1791.69,1527 1810.1,1508.58 1810.1,1491.41 1823.84,1477.67 IC3.97@1823.84,1431.46
  Bottom w8: v1(1791.69,1532.64) 1791.01,1531.96 1791.01,1510.5 1828.01,1472.5 1828.01,997.5 1936.01,880.5 1936.01,510.5 2076.01,370.5 2076.01,205.5 2001.01,130.5 ADCL.1@2001.01,100.5
ADC1: ADCL.2 IC3.96 | length 1746.8
  Top w8: v1(1816.01,1575.5) 1816.01,1560.5 1831.01,1545.5 1831.01,1495.5 1843.53,1482.98 IC3.96@1843.53,1431.46
  Bottom w8: v1(1816.01,1575.5) 1816.01,1560.5 1831.01,1545.5 1831.01,1495.5 1847.01,1479.5 1847.01,1002.5 1955.01,888.5 1955.01,524.5 2101.01,378.5 ADCL.2@2101.01,100.5
ADC2: ADCL.3 IC3.95 | length 1838.6
  Top w8: v1(1851.01,1610.5) 1851.01,1500.5 1863.01,1488.5 1863.01,1431.67 IC3.95@1863.21,1431.46 IC3.95@1861.97,1431.46
  Bottom w8: v1(1851.01,1610.5) 1851.01,1500.5 1866.01,1485.5 1866.01,1011.5 1978.01,893.5 1978.01,530.5 2201.01,307.5 ADCL.3@2201.01,100.5
ADC3: ADCL.4 IC3.94 | length 1957
  Top w8: IC3.94@1882.9,1431.46 1882.9,1493.61 1871.01,1505.5 1871.01,1580.5 1886.01,1595.5 v1(1886.01,1645.5)
  Bottom w8: v1(1886.01,1645.5) 1886.01,1595.5 1871.01,1580.5 1871.01,1505.5 1881.01,1495.5 1885.01,1490.5 1885.01,1016.5 1999.01,900.5 1999.01,539.5 2301.01,237.5 2301.01,124.5 2305.01,120.5 2305.01,112.5 2301.01,108.5 ADCL.4@2301.01,100.5
ADC4: ADCL.5 IC3.93 | length 2073.4
  Top w8: IC3.93@1902.58,1431.46 1902.58,1498.93 1891.01,1510.5 1891.01,1575.5 1906.01,1590.5 1906.01,1620.5 1921.01,1635.5 v1(1921.01,1680.5)
  Bottom w8: v1(1921.01,1680.5) 1921.01,1635.5 1906.01,1620.5 1906.01,1590.5 1891.01,1575.5 1891.01,1510.5 1903.01,1498.5 1903.01,1024.5 2019.01,906.5 2019.01,550.5 2401.01,168.5 ADCL.5@2401.01,100.5 ADCL.5@2401.01,96.5
ADC5: ADCL.6 IC3.92 | length 2203.3
  Top w8: IC3.92@1922.27,1431.46 1922.27,1504.24 1909.01,1517.5 1909.01,1563.5 1926.01,1580.5 1926.01,1615.5 1941.01,1630.5 1941.01,1655.5 1956.01,1670.5 v1(1956.01,1715.5)
  Bottom w8: v1(1956.01,1715.5) 1956.01,1670.5 1941.01,1655.5 1941.01,1630.5 1926.01,1615.5 1926.01,1582.5 1909.01,1565.5 1909.01,1517.5 1921.01,1505.5 1921.01,1030.5 2041.01,910.5 2041.01,560.5 2421.01,180.5 2446.01,180.5 2501.01,125.5 ADCL.6@2501.01,100.5
ADC6: ADCL.7 IC3.91 | length 1888.5
  Top w8: v1(1939.01,1550.5) 1941.95,1549.56 IC3.91@1941.95,1431.46
  Bottom w8: v1(1939.01,1550.5) 1939.01,1035.5 2061.01,915.5 2061.01,570.5 2421.01,205.5 2451.01,205.5 2481.01,175.5 2526.01,175.5 ADCL.7@2601.01,100.5
ADC7: ADCL.8 IC3.90 | length 2263.2
  Top w8: IC3.90@1961.64,1431.46 1961.64,1521.13 1976.01,1535.5 1976.01,1560.5 1956.01,1580.5 1956.01,1620.5 1986.01,1650.5 v1(1986.01,1665.5)
  Bottom w8: v1(1986.01,1665.5) 1986.01,1650.5 1956.01,1620.5 1956.01,1580.5 1976.01,1560.5 1976.01,1541.5 1957.01,1522.5 1957.01,1040.5 2081.01,920.5 2081.01,575.5 2421.01,235.5 2451.01,235.5 2486.01,200.5 2526.01,200.5 2551.01,175.5 2651.01,175.5 2701.01,125.5 ADCL.8@2701.01,100.5
AREF: C3.1 IC3.98 | length 1003.4
  Top w10: v1(1666.01,1591.5) 1727.75,1529.76 1747.39,1529.76 1804.16,1472.99 IC3.98@1804.16,1431.46
  Bottom w12: v1(1111.01,1805.5) 1662.01,1805.5 1676.01,1791.5 1676.01,1602.5 v1(1666.01,1591.5)
AVCC: C16.1 IC3.100 L2.1 | length 195.6
  Top w8: C16.1@1718.93,1487.08 1760.4,1487.08 1764.79,1482.69 IC3.100@1764.79,1431.46
  Top w20: L2.1@1642.21,1529.23 1650.99,1526.5 1685.01,1526.5 1718.93,1492.58 C16.1@1718.93,1487.08
CMP: C12.2 IC7.5 RN5.3 RN5.5 | length 480.7
  Top w8: IC7.5@642.86,878.85 692.66,878.85 711.01,860.5 711.01,790.5 816.01,685.5 C12.2@816.01,675.5
  Top w10: RN5.5@699.44,697.74 718.77,697.74 726.01,690.5 726.01,670.5 731.01,665.5 RN5.3@751.84,665.5
  Top w12: RN5.3@751.84,665.5 RN5.3@752.58,666.25 ; 783.29,666.25 RN5.3@752.58,666.25 ; C12.2@816.01,675.5 806.76,666.25 RN5.3@752.58,666.25
D+: RN2.5 X2.3 Z2.2 | length 406.1
  Top w16: 276.01,1600.5 284.47,1608.96 357.55,1608.96 396.01,1570.5 396.01,1525.5 411.01,1510.5 446.68,1510.5 RN2.5@449.44,1507.74 458.25,1507.74 474.01,1523.5 474.01,1532.5 491.01,1549.5 502.38,1549.5 Z2.2@515.38,1562.5 Z2.2@510.38,1555.5
  Top w24: X2.3@257.7,1549.71 257.7,1582.19 276.01,1600.5
D-: RN2.8 X2.2 Z1.2 | length 286.5
  Top w16: 376.01,1500.5 377.55,1500.5 396.01,1482.04 396.01,1480.5 426.01,1410.5 446.68,1410.5 RN2.8@449.44,1413.26 502.19,1360.5 Z1.2@515.38,1350.5
  Top w24: X2.2@336.44,1549.71 336.8,1539.71 376.01,1500.5
DTR: C7.1 IC4.13 RN3.4 | length 1283.4
  Top w10: IC4.13@882.47,1380.34 955.85,1380.34 986.01,1410.5 986.01,1473.26 956.01,1503.26 ; v1(936.01,1505.5) 938.25,1503.26 956.01,1503.26 ; RN3.4@1074.44,1503.26 956.01,1503.26
  Top w12: v1(1016.01,715.5) 1026.01,720.5 C7.1@1066.01,720.5
  Bottom w10: v1(936.01,1505.5) 986.01,1455.5 986.01,1085.5 1071.01,1000.5 1071.01,765.5 1021.01,715.5 v1(1016.01,715.5)
GATE_CMD: IC7.7 T1.3 | length 559.9
  Top w12: T1.3@401.01,981.5 406.01,976.5 406.01,855.5 426.01,835.5 511.01,835.5 521.01,825.5 546.01,825.5 611.01,760.5 671.01,760.5 691.01,780.5 691.01,815.5 678.84,827.67 IC7.7@642.86,827.67
  Top w16: T1.3@401.01,970.5 T1.3@401.01,981.5